# Altium PCB GlassLink-PCB.PcbDoc
Units mm, origin at the board's own origin, x right, y up, seen from the top; angles counter-clockwise.
Board outline 35.5 x 13.5 mm, 4 copper layers (Top Layer, L2, L3, Bottom Layer), stack 1.561 mm thick; 43 components, 28 nets, 163 pads, 35 vias.
Unrouted connection lines stored in the file: 1.
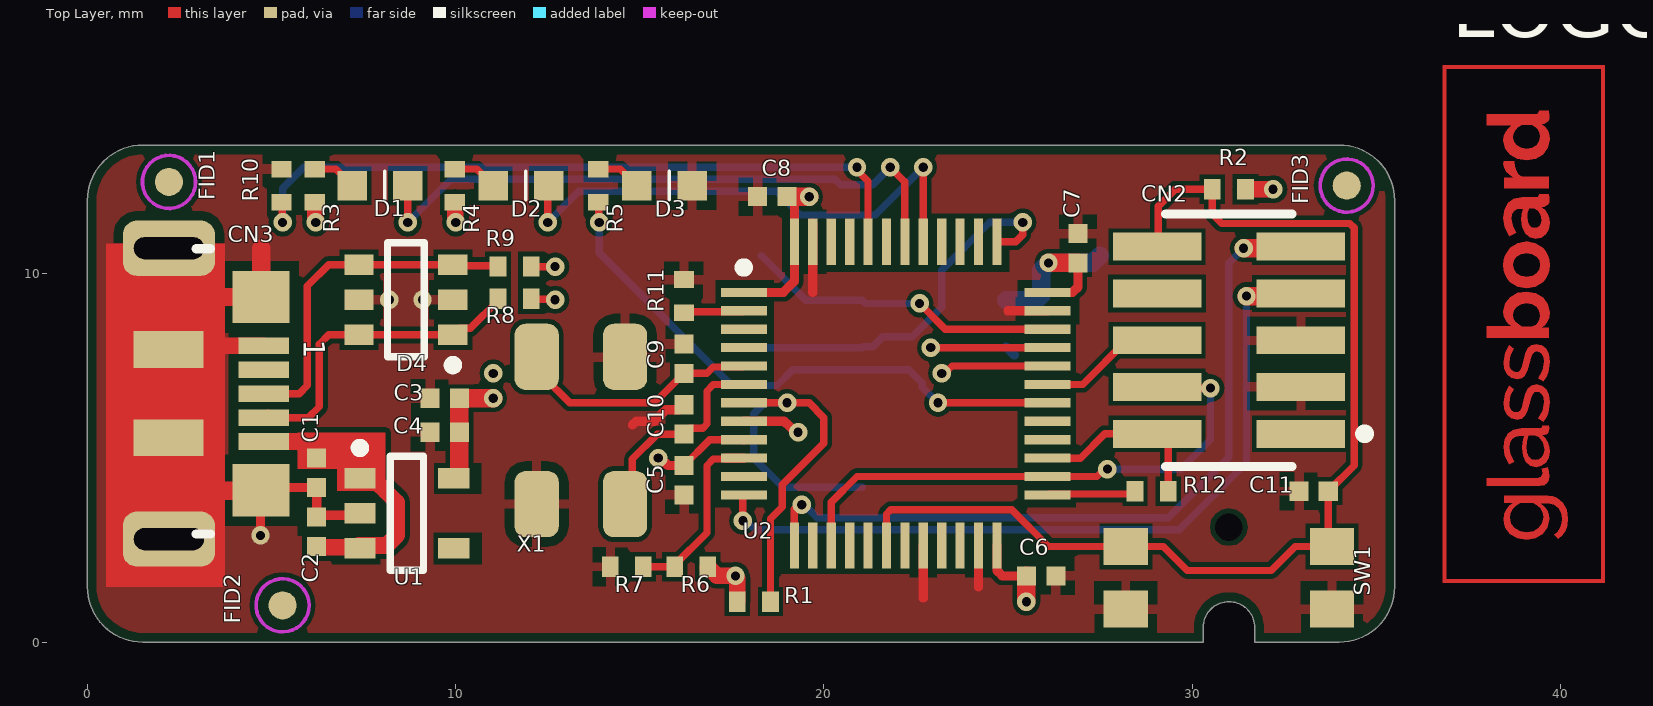
[diagram p0: Top Layer view]
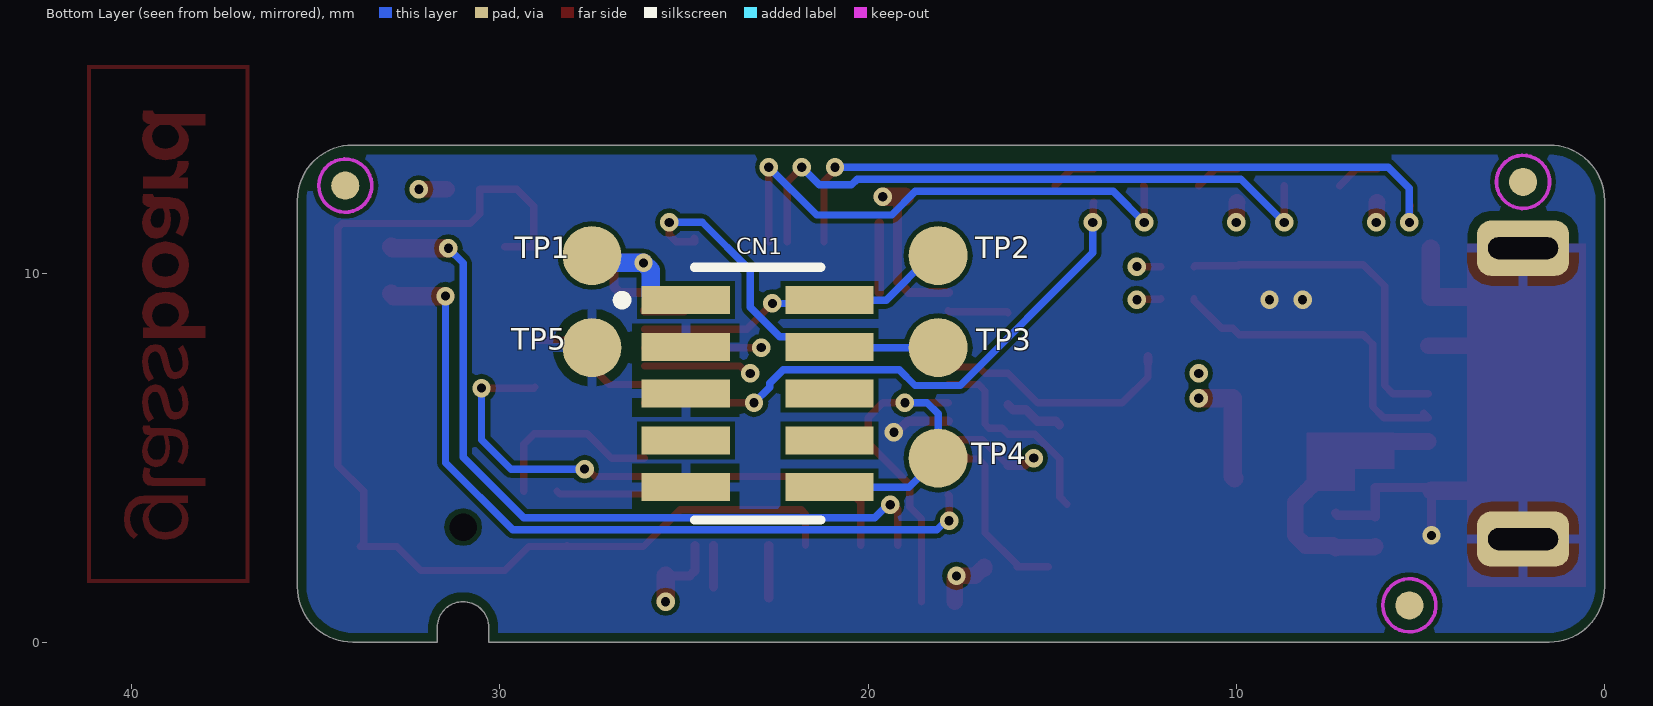
[diagram p1: Bottom Layer view, seen from below]
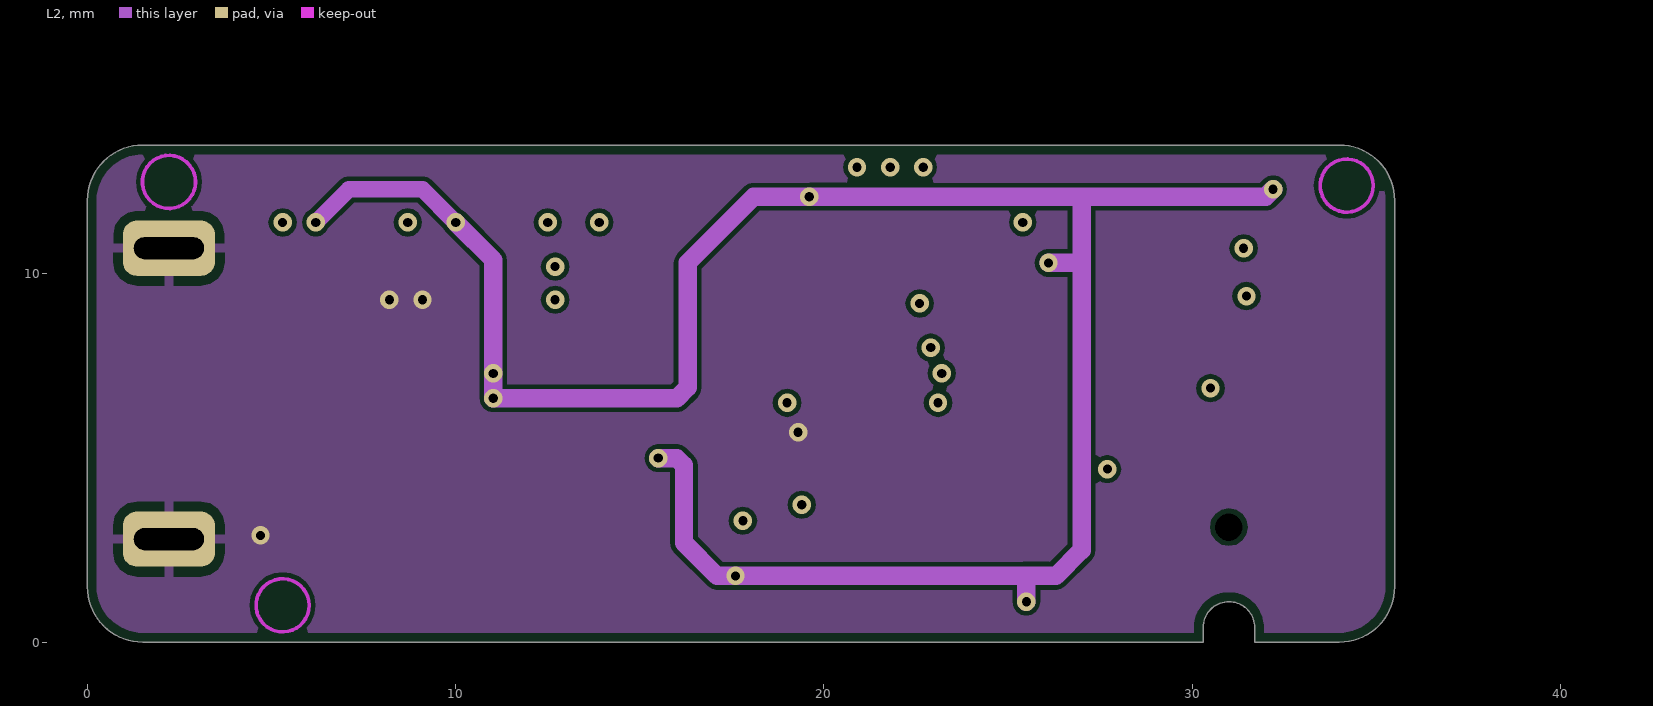
[diagram p2: L2]
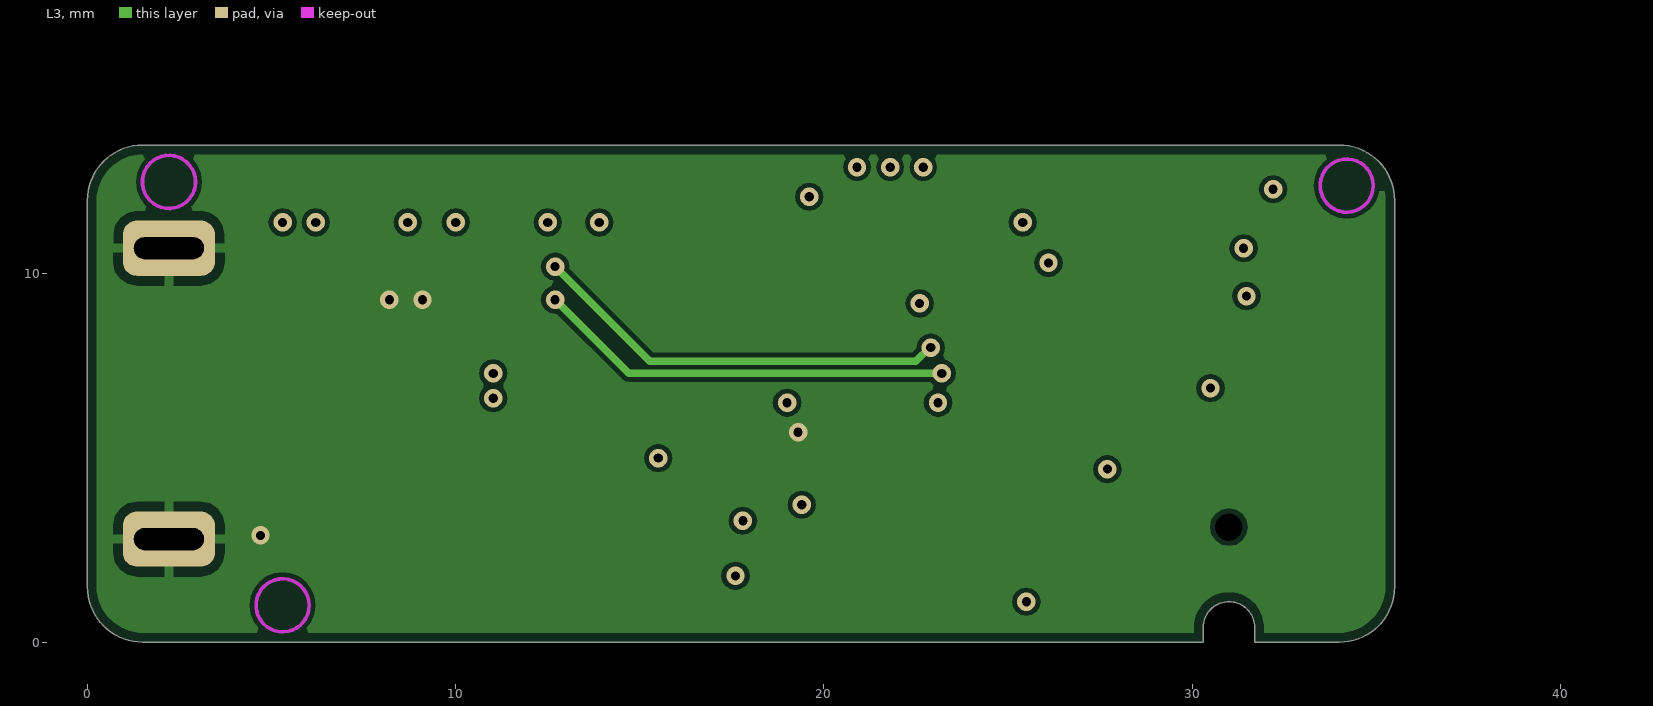
[diagram p3: L3]

## Layer stack, top to bottom
Top Solder: solder mask 0.02, Solder Resist, Dk 3.5
Top Layer: signal copper 0.0356
Dielectric 1: prepreg 0.2275, FR4-TG170, Dk 4.5
L2: signal copper 0.017
Dielectric 3: core 1, FR4-TG170, Dk 4.5
L3: signal copper 0.017
Dielectric 2: prepreg 0.228, FR4-TG170, Dk 4.5
Bottom Layer: signal copper 0.0356
Bottom Solder: solder mask 0.02, Solder Resist, Dk 3.5

## Board outline
0,1.5 ccw(c1.5,1.5) 1.5,0 30.3,0 30.3,0.4 cw(c31,0.4) 31,1.1 cw(c31,0.4) 31.7,0.4 31.7,0 34,0 ccw(c34,1.5) 35.5,1.5 35.5,12 ccw(c34,12) 34,13.5 1.5,13.5 ccw(c1.5,12) 0,12

## Design rules (kind name [scope] priority, off if disabled: settings)
BoardOutlineClearance [Not InComponent('CN1','CN2','CN28','SW1','SW3','U12','D4','D5')] p1: gap=0.254 ignorepadtopadclearanceinfootprint=FALSE
Clearance "Clearance~Sunstone Circuits" [All] p1: gap=0.127 ignorepadtopadclearanceinfootprint=FALSE except(0.152: Arc-Hole Track-Hole SMDPad-Hole THPad-Hole Via-Hole) // Sunstone Circuits Minimum Clearance Rule (MLB~4&6 Layer Designs)
DiffPairsRouting [All] p1: maxlimit=0.254 minlimit=0.102 mostfreqgap=0.127 toplayer_minwidth=0.102 toplayer_maxwidth=0.152 toplayer_prefwidth=0.127 midlayer1_minwidth=0.102 midlayer1_maxwidth=0.152 midlayer1_prefwidth=0.127 midlayer2_minwidth=0.102 midlayer2_maxwidth=0.152 midlayer2_prefwidth=0.127 bottomlayer_minwidth=0.102 bottomlayer_maxwidth=0.152 bottomlayer_prefwidth=0.127 maxuncoupledlength=12.7
HoleSize "HoleSize~Sunstone Circuits" [All] p1: absolutevalues=TRUE maxlimit=6.375 minlimit=0.152 maxpercent=80.000 minpercent=20.000 // Sunstone Circuits Hole Size Rule (MLB~4&6 Layer Designs)
HoleSize Testpoint [All] p2: absolutevalues=TRUE maxlimit=2.54 minlimit=0.025 maxpercent=80.000 minpercent=20.000
HoleSize TestPointUsage [All] p3: absolutevalues=TRUE maxlimit=2.54 minlimit=0.025 maxpercent=80.000 minpercent=20.000
HoleToHoleClearance [All] p1: gap=0.127 allowstackedmicrovias=TRUE
MatchedLengths Ethernet-100-RX [InDifferentialPair('ETH_RX')] p1: tolerance=0.508 checknetsindiffpair=TRUE checkdiffpairvsdiffpair=FALSE checkxsignals=FALSE checkothers=FALSE
MatchedLengths Ethernet-100_TX [InDifferentialPair('ETH_TX')] p2: tolerance=0.508 checknetsindiffpair=TRUE checkdiffpairvsdiffpair=FALSE checkxsignals=FALSE checkothers=FALSE
MatchedLengths USB-90 [InDifferentialPair('ETH_TX')] p3: tolerance=0.508 checknetsindiffpair=TRUE checkdiffpairvsdiffpair=FALSE checkxsignals=FALSE checkothers=FALSE
MinimumAnnularRing MinimumAnnularRing~Tempo [All] p1: minimumring=0.102 // Sunstone Circuits Minimum Annular Ring (MLB~4&6 Layer Designs)
MinimumSolderMaskSliver [Not InComponent('LOGO1')] p1: minsoldermaskwidth=0.127
PlaneClearance "PlaneClearance~Sunstone Circuits" [All] p1: clearance=0.2 // Sunstone Circuits Power Plane Clearance Rule (MLB~4&6 Layer Designs)
PlaneConnect "PlaneConnect~Sunstone Circuits" [IsVia] p1: planeconnectstyle=Direct reliefexpansion=0.152 reliefentries=4 reliefconductorwidth=0.203 reliefairgap=0.152 // Sunstone Circuits Power Plane Connect Rule (MLB~4&6 Layer Designs)
PolygonConnect [IsPad] p1: connectstyle=Relief reliefconductorwidth=0.254 reliefentries=4 polygonreliefangle="90 Angle" airgapwidth=0.254
PolygonConnect "PolygonConnect - GND" [InNet('GND')] p2: thpad.connectstyle=Relief thpad.reliefconductorwidth=0.2 thpad.reliefentries=4 thpad.polygonreliefangle="90 Angle" thpad.airgapwidth=0.2 smdpad.connectstyle=Relief smdpad.reliefconductorwidth=0.2 smdpad.reliefentries=4 smdpad.polygonreliefangle="90 Angle" smdpad.airgapwidth=0.2 via.connectstyle=Direct via.reliefconductorwidth=0.2 via.reliefentries=4 via.polygonreliefangle="90 Angle" via.airgapwidth=0.2
PolygonConnect "PolygonConnect~Sunstone Circuits" [IsVia] p3: connectstyle=Direct reliefconductorwidth=0.203 reliefentries=4 polygonreliefangle="90 Angle" airgapwidth=0 // Sunstone Circuits Polygon Connect Style (MLB~4&6 Layer Designs)
RoutingVias "RoutingVias~Sunstone Circuits" [All] p1: holewidth=0.254 width=0.508 viastyle="Through Hole" minholewidth=0.152 minwidth=0.381 maxholewidth=0.508 maxwidth=1.016 // Sunstone Circuits Routing Vias Rule (MLB~4&6 Layer Designs)
ShortCircuit "ShortCircuit~Sunstone Circuits" [All] p1: allowed=FALSE // Sunstone Circuits Short Circuit Rule~Do Not Allow (MLB~4&6 Layer Designs)
SilkToSilkClearance [All] p1: silktosilkclearance=0.127
SilkToSolderMaskClearance [IsPad] p1: minsilkscreentomaskgap=0.127 clearancetoexposedcopper=TRUE
SolderMaskExpansion "SolderMaskExpansion~Sunstone Circuits" [All] p1: expansion=0.076 istentingtop=FALSE // Sunstone Circuits Solder Mask Expansion Rule (MLB~4&6 Layer Designs)
ViasUnderSMD "ViasUnderSMD~Sunstone Circuits" [All] p1: allowed=FALSE // Sunstone Circuits Vias Under SMD~Do Not Allow (MLB~4&6 Layer Designs)
Width Width~Tempo [All] p1: maxlimit=2.54 minlimit=0.102 preferedwidth=0.254 // Sunstone Circuits Minimum Width Rule (MLB~4&6 Layer Designs)
21 further rules are at their usual default settings.

## Components (designator, comment, footprint, x,y, rotation, side; value= is the part's Value field where it differs from the comment)
C1 "10µF" CAPC0402(1005)70_L 6.225,4.6 r90 top
C2 "0.1µF" CAPC0402(1005)70_L 6.225,3 r270 top
C3 "0.1µF" CAPC0402(1005)70_L 9.7,6.623 r0 top
C4 "10µF" CAPC0402(1005)70_L 9.7,5.7 r0 top
C5 "0.1µF" CAPC0402(1005)70_L 16.2,4.4 r90 top
C6 "0.1µF" CAPC0402(1005)70_L 25.9,1.8 r180 top
C7 "0.1µF" CAPC0402(1005)70_L 26.9,10.7 r270 top
C8 "0.1µF" CAPC0402(1005)70_L 18.6,12.1 r0 top
C9 "18pF" CAPC0402(1005)70_L 16.2,7.7 r270 top
C10 "18pF" CAPC0402(1005)70_L 16.2,6.05 r270 top
C11 "0.1µF" CAPC0402(1005)70_L 33.3,4.1 r0 top
CN1 "FTSH-105-01-F-DV-K" FTSH-105-01-F-DV-K 23,6.75 r270 bottom
CN2 "FTSH-105-01-F-DV-K" FTSH-105-01-F-DV-K 31,8.2 r90 top
CN3 "1051640001" 1051640001 3.5,6.75 r270 top locked
D1 "LTST-C191TBKT" LTST-C191KGKT 7.946,12.4 r0 top
D2 "LTST-C191KGKT" LTST-C191KGKT 11.773,12.4 r0 top
D3 "LTST-C191KRKT" LTST-C191KGKT 15.673,12.4 r0 top
D4 "SN65220DBVR" SN65220DBVR-L 8.65,9.3 r180 top
FID1 "FID" fid_30mil 2.213,12.5 r90 top
FID2 "FID" fid_30mil 5.3,1 r90 top
FID3 "FID" fid_30mil 34.2,12.4 r90 top
LOGO1 "Glassboard-Logo" Glassboard-Sm 39.1,8.574 r90 top
R1 "10k" RESC0402(1005)_L 18.1,1.1 r180 top
R2 "10k" RESC0402(1005)_L 31,12.3 r0 top
R3 "1.5k" RESC0402(1005)_L 6.173,12.4 r90 top
R4 "1.5k" RESC0402(1005)_L 9.973,12.4 r90 top
R5 "470" RESC0402(1005)_L 13.873,12.4 r90 top
R6 "4.7k" RESC0402(1005)_L 16.4,2.05 r0 top
R7 "4.7k" RESC0402(1005)_L 14.65,2.05 r0 top
R8 "22" RESC0402(1005)_L 11.6,9.325 r0 top
R9 "22" RESC0402(1005)_L 11.6,10.2 r0 top
R10 "100k" RESC0402(1005)_L 5.273,12.4 r90 top
R11 "10k" RESC0402(1005)_L 16.2,9.4 r270 top
R12 "100" RESC0402(1005)_L 28.9,4.1 r0 top
SW1 "TL1014BF160QG" TL1014BF160QG 31,1.75 r0 top
TP1 "TESTFIXTURE_16MM" TESTFIXTURE_16MM 27.5,10.5 r180 bottom
TP2 "TESTFIXTURE_16MM" TESTFIXTURE_16MM 18.1,10.5 r180 bottom
TP3 "TESTFIXTURE_16MM" TESTFIXTURE_16MM 18.1,8 r180 bottom
TP4 "TESTFIXTURE_16MM" TESTFIXTURE_16MM 18.1,5 r180 bottom
TP5 "TESTFIXTURE_16MM" TESTFIXTURE_16MM 27.5,8 r180 bottom
U1 "AP2204K-3.3TRG1" AP2204K-3.3TRG1_L 8.675,3.5 r0 top
U2 "STM32F103CBT6" STM32F103CBT6 21.95,6.75 r0 top locked
X1 "ABM3B-8.000MHZ-B2-T" ABM3B-8.000MHZ-B2-T 13.4,5.75 r270 top

## Footprints (in the part's own frame and the unit in brackets; to place one, negate y for a bottom-side part, rotate by r counter-clockwise, add the part's x,y. Pads: shape width x height; smd on the part's side, far side on the other; paste and mask are expansions set on the pad)
1051640001 [mm] "CONN RCPT USB2.0 MICRO B SMD R/A"
  rect 0.45x1.38 smd: 1(1.3,1.287) 2(0.65,1.287) 3(0,1.287) 4(-0.65,1.287) 5(-1.3,1.287)
  rrect50% 1.5x2.5 hole 1.9 slot 0.6 at 0 deg: M1(-3.95,-1.287) M1(3.95,-1.287)
  rect 1.425x1.55 smd: M1(-2.625,1.215) M1(2.625,1.215)
  rect 1x1.9 smd: M1(-1.2,-1.3) M1(1.2,-1.3)
  Top Layer pour cut-out: -3.439,2.092 3.439,2.092 3.439,0.333 -3.439,0.333
  silkscreen extent -3.94,-0.54 3.81,-0.16, body extent -4.13,-3.39 4.07,1.76, height 2.48
ABM3B-8.000MHZ-B2-T [mm]
  rrect50% 1.8x1.2 smd: 1(-2,-1.2) 2(-2,1.2) 3(2,1.2) 4(2,-1.2)
  body extent -2.5,-1.6 2.5,1.6, height 1.11
AP2204K-3.3TRG1_L [mm]
  rect 0.85x0.55 smd: 1(-1.275,0.95) 2(-1.275,0) 3(-1.275,-0.95) 4(1.275,-0.95) 5(1.275,0.95)
  silkscreen extent -1.4,-1.55 0.45,1.9, body extent -1.5,-1.55 1.5,1.55, height 1.45
CAPC0402(1005)70_L [mm] "Chip Capacitor, Body 1.0x0.5mm, Height 0.7mm, IPC High Density"
  rect 0.52x0.52 smd: 1(-0.4,0) 2(0.4,0)
  body extent -0.55,-0.3 0.55,0.3, height 0.7
fid_30mil [mil]
  round 30 smd paste-39.37 mask+11.81: 0(0,0)
  round 30 smd far side paste-39.37 mask+11.81: 0(0,0)
  Keep-Out Layer circle w3.94: c0,0 r28.39
FTSH-105-01-F-DV-K [mm] "MINITEK 1.27MM PITCH 10 POSITION UNSHROUDED HEADER"
  rect 0.76x2.4 smd: 1(-2.54,-1.95) 2(-2.54,1.95) 3(-1.27,-1.95) 4(-1.27,1.95) 5(0,-1.95) 6(0,1.95) 7(1.27,-1.95) 8(1.27,1.95) 9(2.54,-1.95) 10(2.54,1.95)
  silkscreen extent -3.43,-3.81 3.43,1.72, body extent -3.17,-2.92 3.18,2.92, height 6.11
Glassboard-Sm [mm]
  Top Layer region: 0,0.411 0,0.411 0,0.411 0,0.411 0,0.411 0,0.411 0,0.411 0,0.411 0,0.411 0,0.411 0,0.411 0,0.411 0,0.411 0,0.411 0,0.411 0.075,0.51 0.17,0.584 0.284,0.63 0.415,0.646 0.632,0.594 0.801,0.458 0.91,0.256 0.948,0.013 0.905,-0.233 0.786,-0.431 0.605,-0.564 0.38,-0.613 0.249,-0.597 0.132,-0.55 0.035,-0.476 -0.039,-0.379 -0.039,-0.379 -0.039,-0.379 -0.039,-0.379 -0.039,-0.379 -0.039,-0.379 -0.039,-0.379 -0.039,-0.379 -0.039,-0.379 -0.039,-0.379 -0.039,-0.379 -0.039,-0.379 -0.039,-0.379 -0.039,-0.379 -0.039,-0.379 -0.039,-0.59 -0.31,-0.59 -0.31,1.102 0,1.102 hole: 0.313,0.381 0.313,0.381 0.313,0.381 0.214,0.364 0.214,0.364 0.214,0.364 0.126,0.313 0.126,0.313 0.126,0.313 0,0.145 0,0.145 0,0.145 0,-0.145 0,-0.145 0,-0.145 0.047,-0.228 0.047,-0.228 0.047,-0.228 0.118,-0.292 0.118,-0.292 0.118,-0.292 0.204,-0.334 0.204,-0.334 0.204,-0.334 0.294,-0.349 0.294,-0.349 0.294,-0.349 0.43,-0.32 0.43,-0.32 0.43,-0.32 0.537,-0.242 0.537,-0.242 0.537,-0.242 0.606,-0.129 0.606,-0.129 0.606,-0.129 0.631,0.01 0.631,0.01 0.631,0.011 0.607,0.152 0.607,0.152 0.607,0.152 0.541,0.27 0.541,0.27 0.541,0.27 0.44,0.351 0.44,0.351 0.44,0.351
  Top Layer region: 7.089,-2.102 -6.961,-2.102 -6.961,2.293 7.089,2.293 hole: 6.981,2.185 -6.853,2.185 -6.853,2.185 -6.853,2.185 -6.853,-1.994 -6.853,-1.994 -6.853,-1.994 6.981,-1.994 6.981,-1.994 6.981,-1.994 6.981,2.185 6.981,2.185
  Top Layer region: -4.121,-0.277 -4.121,-0.277 -4.121,-0.277 -4.085,-0.382 -4.085,-0.382 -4.085,-0.382 -4.085,-0.382 -4.085,-0.382 -4.085,-0.382 -4.085,-0.382 -3.984,-0.421 -3.984,-0.421 -3.984,-0.421 -3.924,-0.413 -3.924,-0.413 -3.924,-0.413 -3.859,-0.393 -3.827,-0.557 -3.947,-0.592 -4.07,-0.606 -4.176,-0.589 -4.256,-0.539 -4.308,-0.458 -4.325,-0.351 -4.325,1.102 -4.121,1.102
  Top Layer region: 4.458,0.642 4.483,0.639 4.483,0.356 4.349,0.341 4.349,0.341 4.349,0.341 4.23,0.301 4.23,0.301 4.23,0.301 4.134,0.236 4.134,0.236 4.134,0.236 4.07,0.145 4.07,0.145 4.07,0.145 4.07,-0.59 3.76,-0.59 3.76,0.625 4.045,0.625 4.045,0.365 4.045,0.365 4.045,0.365 4.045,0.365 4.045,0.365 4.045,0.365 4.045,0.365 4.045,0.365 4.045,0.365 4.045,0.365 4.045,0.365 4.045,0.365 4.045,0.365 4.045,0.365 4.045,0.365 4.117,0.478 4.208,0.567 4.311,0.624 4.42,0.643
  Top Layer region: 5.769,-0.233 5.769,-0.233 5.769,-0.233 5.787,-0.303 5.787,-0.303 5.787,-0.303 5.787,-0.303 5.788,-0.303 5.788,-0.303 5.788,-0.303 5.852,-0.326 5.852,-0.59 5.704,-0.606 5.628,-0.595 5.571,-0.567 5.512,-0.462 5.505,-0.379 5.505,-0.379 5.505,-0.379 5.505,-0.379 5.505,-0.379 5.505,-0.379 5.505,-0.379 5.505,-0.379 5.505,-0.379 5.505,-0.379 5.505,-0.379 5.505,-0.379 5.505,-0.379 5.505,-0.379 5.505,-0.379 5.426,-0.48 5.324,-0.554 5.207,-0.598 5.083,-0.613 4.852,-0.564 4.671,-0.43 4.551,-0.229 4.508,0.017 4.549,0.263 4.661,0.462 4.833,0.597 5.051,0.646 5.177,0.629 5.29,0.581 5.386,0.506 5.459,0.411 5.459,0.411 5.459,0.411 5.459,0.411 5.459,0.411 5.459,0.411 5.459,0.411 5.459,0.411 5.459,0.411 5.459,0.411 5.459,0.411 5.459,0.411 5.459,0.411 5.459,0.411 5.459,0.411 5.459,1.102 5.769,1.102 hole: 5.146,0.381 5.146,0.381 5.146,0.381 5.017,0.351 5.017,0.351 5.017,0.351 4.916,0.269 4.916,0.269 4.916,0.269 4.851,0.15 4.851,0.15 4.851,0.15 4.828,0.011 4.828,0.01 4.828,0.01 4.853,-0.131 4.853,-0.131 4.853,-0.131 4.924,-0.245 4.924,-0.245 4.924,-0.245 5.031,-0.321 5.031,-0.321 5.031,-0.321 5.164,-0.349 5.164,-0.349 5.164,-0.349 5.255,-0.334 5.255,-0.334 5.255,-0.334 5.34,-0.291 5.34,-0.291 5.34,-0.291 5.412,-0.226 5.412,-0.226 5.412,-0.226 5.461,-0.145 5.461,-0.145 5.461,-0.145 5.461,0.145 5.461,0.145 5.461,0.145 5.409,0.238 5.409,0.238 5.409,0.238 5.332,0.314 5.332,0.314 5.332,0.314 5.241,0.365 5.241,0.365 5.241,0.365
  Top Layer region: 3.19,0.613 3.364,0.517 3.473,0.36 3.509,0.145 3.509,-0.233 3.509,-0.233 3.509,-0.233 3.528,-0.303 3.528,-0.303 3.528,-0.303 3.528,-0.303 3.528,-0.303 3.528,-0.303 3.528,-0.303 3.593,-0.326 3.593,-0.59 3.51,-0.603 3.51,-0.603 3.444,-0.606 3.367,-0.595 3.31,-0.565 3.252,-0.462 3.245,-0.395 3.245,-0.395 3.245,-0.395 3.245,-0.395 3.245,-0.395 3.245,-0.395 3.245,-0.395 3.245,-0.395 3.245,-0.395 3.245,-0.395 3.245,-0.395 3.245,-0.395 3.245,-0.395 3.245,-0.395 3.155,-0.489 3.048,-0.557 2.928,-0.599 2.8,-0.613 2.635,-0.584 2.503,-0.503 2.416,-0.381 2.385,-0.228 2.423,-0.07 2.53,0.054 2.693,0.134 2.902,0.163 3.061,0.149 3.199,0.11 3.199,0.11 3.199,0.11 3.199,0.11 3.199,0.11 3.199,0.11 3.199,0.11 3.199,0.11 3.199,0.11 3.199,0.11 3.199,0.11 3.199,0.18 3.199,0.18 3.199,0.18 3.181,0.286 3.181,0.286 3.181,0.286 3.13,0.365 3.13,0.365 3.13,0.365 3.045,0.414 3.045,0.414 3.045,0.414 2.927,0.43 2.927,0.43 2.927,0.43 2.737,0.395 2.737,0.395 2.737,0.395 2.547,0.293 2.452,0.49 2.696,0.607 2.958,0.646 hole: 2.953,-0.01 2.953,-0.01 2.953,-0.01 2.843,-0.024 2.843,-0.024 2.843,-0.024 2.756,-0.065 2.756,-0.065 2.756,-0.065 2.698,-0.127 2.698,-0.127 2.698,-0.127 2.679,-0.203 2.679,-0.203 2.679,-0.203 2.694,-0.275 2.694,-0.275 2.694,-0.275 2.74,-0.334 2.74,-0.334 2.74,-0.334 2.807,-0.373 2.807,-0.373 2.807,-0.373 2.888,-0.386 2.888,-0.386 2.888,-0.386 3.037,-0.358 3.037,-0.358 3.037,-0.358 3.148,-0.284 3.148,-0.284 3.148,-0.284 3.199,-0.196 3.199,-0.196 3.199,-0.196 3.199,-0.057 3.199,-0.057 3.199,-0.057 3.199,-0.057 3.199,-0.057 3.199,-0.057 3.199,-0.057 3.078,-0.023 3.078,-0.023 3.078,-0.023
  Top Layer region: 1.814,0.633 1.939,0.594 2.138,0.457 2.264,0.256 2.309,0.015 2.264,-0.224 2.139,-0.424 2.049,-0.502 1.94,-0.562 1.814,-0.6 1.673,-0.613 1.533,-0.6 1.407,-0.562 1.298,-0.502 1.207,-0.424 1.08,-0.224 1.036,0.015 1.08,0.256 1.207,0.457 1.298,0.535 1.407,0.594 1.533,0.633 1.673,0.645 hole: 1.673,0.381 1.673,0.381 1.673,0.381 1.548,0.354 1.548,0.353 1.548,0.353 1.447,0.277 1.447,0.277 1.447,0.277 1.38,0.161 1.38,0.161 1.38,0.161 1.356,0.015 1.356,0.015 1.356,0.015 1.38,-0.132 1.38,-0.132 1.38,-0.132 1.447,-0.247 1.447,-0.247 1.447,-0.247 1.548,-0.322 1.548,-0.322 1.548,-0.322 1.673,-0.349 1.673,-0.349 1.673,-0.349 1.799,-0.322 1.799,-0.322 1.799,-0.322 1.9,-0.247 1.9,-0.247 1.9,-0.247 1.967,-0.131 1.967,-0.131 1.967,-0.131 1.991,0.017 1.991,0.017 1.991,0.017 1.967,0.163 1.967,0.164 1.967,0.164 1.9,0.279 1.9,0.279 1.9,0.279 1.799,0.355 1.799,0.355 1.799,0.355
  Top Layer region: -3.058,0.609 -2.9,0.513 -2.799,0.36 -2.765,0.154 -2.765,-0.34 -2.765,-0.34 -2.765,-0.34 -2.749,-0.394 -2.749,-0.394 -2.749,-0.394 -2.749,-0.394 -2.749,-0.394 -2.749,-0.394 -2.749,-0.394 -2.7,-0.414 -2.7,-0.59 -2.744,-0.597 -2.744,-0.597 -2.784,-0.599 -2.883,-0.571 -2.921,-0.534 -2.936,-0.476 -2.941,-0.39 -2.941,-0.39 -2.941,-0.39 -2.941,-0.39 -2.941,-0.39 -2.941,-0.39 -2.941,-0.39 -2.941,-0.39 -2.941,-0.39 -2.941,-0.39 -2.941,-0.39 -3.036,-0.488 -3.15,-0.557 -3.274,-0.599 -3.4,-0.613 -3.567,-0.584 -3.699,-0.505 -3.786,-0.387 -3.817,-0.242 -3.78,-0.086 -3.675,0.035 -3.512,0.111 -3.307,0.138 -3.129,0.122 -2.969,0.078 -2.969,0.078 -2.969,0.078 -2.969,0.078 -2.969,0.078 -2.969,0.078 -2.969,0.078 -2.969,0.078 -2.969,0.078 -2.969,0.078 -2.969,0.078 -2.969,0.175 -2.969,0.175 -2.969,0.175 -2.99,0.307 -2.99,0.307 -2.99,0.307 -3.052,0.408 -3.052,0.408 -3.052,0.408 -3.153,0.471 -3.153,0.471 -3.153,0.471 -3.289,0.493 -3.289,0.493 -3.289,0.493 -3.477,0.457 -3.477,0.457 -3.477,0.457 -3.674,0.351 -3.741,0.483 -3.507,0.602 -3.266,0.641 hole: -3.275,0.015 -3.275,0.015 -3.275,0.015 -3.417,-0.001 -3.417,-0.001 -3.417,-0.001 -3.528,-0.049 -3.528,-0.049 -3.528,-0.049 -3.599,-0.124 -3.599,-0.124 -3.599,-0.124 -3.623,-0.224 -3.623,-0.224 -3.623,-0.224 -3.604,-0.313 -3.604,-0.313 -3.604,-0.313 -3.551,-0.388 -3.551,-0.388 -3.551,-0.388 -3.465,-0.44 -3.465,-0.44 -3.465,-0.44 -3.349,-0.46 -3.349,-0.46 -3.349,-0.46 -3.159,-0.418 -3.159,-0.418 -3.159,-0.418 -3.013,-0.317 -3.013,-0.316 -3.013,-0.316 -2.969,-0.221 -2.969,-0.221 -2.969,-0.221 -2.969,-0.043 -2.969,-0.043 -2.969,-0.043 -2.969,-0.043 -2.969,-0.043 -2.969,-0.043 -2.969,-0.043 -3.121,0 -3.121,0 -3.121,0
  Top Layer region: -1.808,0.597 -1.609,0.481 -1.701,0.358 -1.873,0.459 -1.873,0.459 -1.873,0.459 -2.067,0.493 -2.067,0.493 -2.067,0.493 -2.17,0.481 -2.17,0.481 -2.17,0.481 -2.256,0.445 -2.256,0.445 -2.256,0.445 -2.315,0.383 -2.315,0.383 -2.315,0.383 -2.334,0.293 -2.334,0.293 -2.334,0.293 -2.319,0.224 -2.319,0.224 -2.319,0.224 -2.269,0.175 -2.269,0.175 -2.269,0.175 -2.18,0.138 -2.18,0.138 -2.18,0.138 -2.049,0.103 -1.839,0.046 -1.691,-0.022 -1.603,-0.115 -1.574,-0.244 -1.606,-0.396 -1.703,-0.513 -1.856,-0.588 -2.053,-0.613 -2.341,-0.568 -2.472,-0.512 -2.584,-0.437 -2.496,-0.3 -2.283,-0.422 -2.283,-0.422 -2.283,-0.422 -2.058,-0.462 -2.058,-0.462 -2.058,-0.462 -1.94,-0.449 -1.94,-0.449 -1.94,-0.449 -1.848,-0.41 -1.848,-0.41 -1.848,-0.41 -1.79,-0.347 -1.79,-0.347 -1.79,-0.347 -1.771,-0.263 -1.771,-0.263 -1.771,-0.263 -1.792,-0.188 -1.792,-0.188 -1.792,-0.188 -1.854,-0.133 -1.854,-0.133 -1.854,-0.133 -1.961,-0.091 -1.961,-0.091 -1.961,-0.091 -2.111,-0.052 -2.299,0.001 -2.429,0.061 -2.503,0.145 -2.526,0.265 -2.49,0.426 -2.392,0.545 -2.245,0.617 -2.063,0.641
  Top Layer region: -0.711,0.597 -0.512,0.481 -0.605,0.358 -0.776,0.459 -0.776,0.459 -0.776,0.459 -0.971,0.493 -0.971,0.493 -0.971,0.493 -1.074,0.481 -1.074,0.481 -1.074,0.481 -1.16,0.445 -1.16,0.445 -1.16,0.445 -1.218,0.383 -1.218,0.383 -1.218,0.383 -1.238,0.293 -1.238,0.293 -1.238,0.293 -1.223,0.224 -1.223,0.224 -1.223,0.224 -1.173,0.175 -1.173,0.175 -1.173,0.175 -1.084,0.138 -1.084,0.138 -1.084,0.138 -0.953,0.103 -0.743,0.046 -0.595,-0.022 -0.506,-0.115 -0.477,-0.244 -0.51,-0.396 -0.607,-0.513 -0.76,-0.588 -0.957,-0.613 -1.245,-0.568 -1.376,-0.512 -1.488,-0.437 -1.4,-0.3 -1.187,-0.422 -1.187,-0.422 -1.187,-0.422 -0.962,-0.462 -0.962,-0.462 -0.962,-0.462 -0.843,-0.449 -0.843,-0.449 -0.843,-0.449 -0.752,-0.41 -0.752,-0.41 -0.752,-0.41 -0.694,-0.347 -0.694,-0.347 -0.694,-0.347 -0.674,-0.263 -0.674,-0.263 -0.674,-0.263 -0.695,-0.188 -0.695,-0.188 -0.695,-0.188 -0.758,-0.133 -0.758,-0.133 -0.758,-0.133 -0.864,-0.091 -0.864,-0.091 -0.864,-0.091 -1.015,-0.052 -1.015,-0.052 -1.203,0.001 -1.333,0.061 -1.407,0.145 -1.43,0.265 -1.394,0.426 -1.296,0.545 -1.148,0.617 -0.966,0.641
  Top Layer region: -5.093,0.622 -4.972,0.567 -4.869,0.483 -4.784,0.379 -4.784,0.379 -4.784,0.379 -4.784,0.379 -4.784,0.379 -4.784,0.379 -4.784,0.379 -4.784,0.379 -4.784,0.379 -4.784,0.379 -4.784,0.379 -4.784,0.379 -4.784,0.379 -4.784,0.379 -4.784,0.379 -4.784,0.62 -4.603,0.62 -4.603,-0.576 -4.615,-0.698 -4.652,-0.804 -4.784,-0.97 -4.98,-1.072 -5.22,-1.107 -5.407,-1.089 -5.554,-1.036 -5.673,-0.952 -5.769,-0.84 -5.651,-0.736 -5.568,-0.829 -5.568,-0.829 -5.568,-0.829 -5.465,-0.896 -5.465,-0.896 -5.465,-0.896 -5.347,-0.936 -5.347,-0.936 -5.347,-0.936 -5.22,-0.949 -5.22,-0.949 -5.22,-0.949 -5.061,-0.926 -5.061,-0.926 -5.061,-0.926 -4.93,-0.856 -4.93,-0.856 -4.93,-0.856 -4.841,-0.741 -4.841,-0.741 -4.841,-0.741 -4.807,-0.576 -4.807,-0.576 -4.807,-0.576 -4.807,-0.363 -4.807,-0.363 -4.807,-0.363 -4.807,-0.363 -4.807,-0.363 -4.807,-0.363 -4.807,-0.363 -4.807,-0.363 -4.807,-0.363 -4.807,-0.363 -4.807,-0.363 -4.807,-0.363 -4.807,-0.363 -4.807,-0.363 -4.807,-0.363 -4.889,-0.463 -4.992,-0.54 -5.111,-0.588 -5.238,-0.604 -5.464,-0.553 -5.641,-0.416 -5.756,-0.219 -5.797,0.013 -5.756,0.255 -5.641,0.455 -5.464,0.591 -5.355,0.628 -5.236,0.641 hole: -5.194,0.465 -5.194,0.465 -5.194,0.465 -5.36,0.425 -5.36,0.425 -5.36,0.425 -5.484,0.321 -5.484,0.321 -5.484,0.321 -5.563,0.174 -5.563,0.174 -5.563,0.174 -5.59,0.008 -5.59,0.008 -5.59,0.008 -5.558,-0.163 -5.558,-0.163 -5.558,-0.163 -5.47,-0.305 -5.47,-0.305 -5.47,-0.305 -5.339,-0.401 -5.339,-0.401 -5.339,-0.401 -5.176,-0.437 -5.176,-0.437 -5.176,-0.437 -5.05,-0.414 -5.05,-0.414 -5.05,-0.414 -4.939,-0.352 -4.939,-0.352 -4.939,-0.352 -4.853,-0.265 -4.853,-0.265 -4.853,-0.265 -4.807,-0.166 -4.807,-0.166 -4.807,-0.166 -4.807,0.182 -4.807,0.182 -4.807,0.182 -4.873,0.296 -4.873,0.296 -4.873,0.296 -4.965,0.385 -4.965,0.385 -4.965,0.385 -5.075,0.444 -5.075,0.444 -5.075,0.444
LTST-C191KGKT [mm] "LED GREEN CLEAR THIN 0603 SMD"
  rect 0.8x0.8 smd: 1(-0.75,0) 2(0.75,0)
  silkscreen extent 0.13,-0.38 0.13,0.38, body extent -0.76,-0.38 0.76,0.38, height 0.55
RESC0402(1005)_L [mm] "Chip Resistor, Body 1.0x0.5mm, IPC High Density"
  rect 0.45x0.55 smd: 1(-0.45,0) 2(0.45,0)
  body extent -0.52,-0.27 0.53,0.28, height 0.4
SN65220DBVR-L [mm]
  rect 0.8x0.55 smd: 1(-1.275,0.95) 2(-1.275,0) 3(-1.275,-0.95) 4(1.275,-0.95) 5(1.275,0) 6(1.275,0.95)
  silkscreen extent -1.4,-1.55 0.5,1.9, body extent -1.5,-1.52 1.5,1.53, height 1.45
STM32F103CBT6 [mm] "IC MCU 32BIT 128KB FLASH 48LQFP"
  rect 1.25x0.25 smd: 1(-4.125,2.75) 2(-4.125,2.25) 3(-4.125,1.75) 4(-4.125,1.25) 5(-4.125,0.75) 6(-4.125,0.25) 7(-4.125,-0.25) 8(-4.125,-0.75) 9(-4.125,-1.25) 10(-4.125,-1.75) 11(-4.125,-2.25) 12(-4.125,-2.75) 25(4.125,-2.75) 26(4.125,-2.25) 27(4.125,-1.75) 28(4.125,-1.25) 29(4.125,-0.75) 30(4.125,-0.25) 31(4.125,0.25) 32(4.125,0.75) 33(4.125,1.25) 34(4.125,1.75) 35(4.125,2.25) 36(4.125,2.75)
  rect 0.25x1.25 smd: 13(-2.75,-4.125) 14(-2.25,-4.125) 15(-1.75,-4.125) 16(-1.25,-4.125) 17(-0.75,-4.125) 18(-0.25,-4.125) 19(0.25,-4.125) 20(0.75,-4.125) 21(1.25,-4.125) 22(1.75,-4.125) 23(2.25,-4.125) 24(2.75,-4.125) 37(2.75,4.125) 38(2.25,4.125) 39(1.75,4.125) 40(1.25,4.125) 41(0.75,4.125) 42(0.25,4.125) 43(-0.25,4.125) 44(-0.75,4.125) 45(-1.25,4.125) 46(-1.75,4.125) 47(-2.25,4.125) 48(-2.75,4.125)
  Top Layer pour cut-out: 3.1,4.9 3.1,3.3 -3.1,3.3 -3.1,4.9
  Top Layer pour cut-out: 4.9,-3.1 3.3,-3.1 3.3,3.1 4.9,3.1
  Top Layer pour cut-out: -4.9,3.1 -3.3,3.1 -3.3,-3.1 -4.9,-3.1
  Top Layer pour cut-out: -3.1,-4.9 -3.1,-3.3 3.1,-3.3 3.1,-4.9
  Top Layer pour cut-out: -4.9,3.1 -3.3,3.1 -3.3,-3.1 -4.9,-3.1
  silkscreen extent -4.25,3.3 -4,3.55, body extent -4.5,-4.5 4.5,4.5, height 1.6
TESTFIXTURE_16MM [mm]
  round 1.6 smd paste-1.6: 1(0,0)
  body extent -0.79,-0.8 0.8,0.8, height 0.05
TL1014BF160QG [mm]
  rect 1.2x1 smd mask+0.05: 1(2.8,0.85) 2(2.8,-0.85) 3(-2.8,0.85) 4(-2.8,-0.85)
  round 0 hole 0.75 unplated mask+0.05: 5(0,1.375) 6(0,-1.375)
  body extent -3.2,-2.75 3.2,1.75, height 1.65

## Part data
C1 C4: library part CC0402MRX5R5BB106, "CAP CER 10UF 6.3V X5R 0402", Distributor 1 Part Number=311-1729-1-ND, Manufacturer=Yageo, Package=CAP0402, Package Type=SMD, Tolerance=0.2, Voltage=6.3V, Component Type="CAP - CHIP", Distributor 1=Digi-Key, ESD=NO, Manufacturer Part Number=CC0402MRX5R5BB106, Moisture Sensitivity=NO, Part Number=CC0402MRX5R5BB106, Pin Count=2, Published=9/8/2017, Publisher="Randy Parmerlee", Status=Active, Wattage=N/A
C2 C3 C5 C6 C7 C8 C11: library part CGA2B2X5R1A104M050BA, "CAP CER 0.1UF 10V X5R 0402", Distributor 1 Part Number=445-12157-1-ND, Manufacturer="TDK Corporation", Package=CAP0402, Package Type=SMD, Tolerance=0.2, Voltage=10V, Component Type="CAP - CHIP", Distributor 1=Digi-Key, ESD=NO, Manufacturer Part Number=CGA2B2X5R1A104M050BA, Moisture Sensitivity=NO, Part Number=CGA2B2X5R1A104M050BA, Pin Count=2, Published=12/9/2015, Publisher="Drew Westrick", Status=Active, Wattage=N/A
C9 C10: library part CC0402JRNPO9BN180, "CAP CER 18PF 50V C0G/NPO 0402", Distributor 1 Part Number=311-1415-1-ND, Manufacturer=Yageo, Package=CAP0402, Package Type=SMD, Tolerance=0.05, Voltage=50V, Component Type="CAP - CHIP", Distributor 1=Digi-Key, ESD=NO, Manufacturer Part Number=CC0402JRNPO9BN180, Moisture Sensitivity=NO, Part Number=CC0402JRNPO9BN180, Pin Count=2, Published=9/8/2017, Publisher="Randy Parmerlee", Status=Active, Wattage=N/A
CN1 CN2: "CONN HEADER 10POS DUAL .05\" SMD", Current=N/A, Distributor 1 Part Number=SAM8796-ND, Manufacturer="Samtec Inc", Package Type=SMD, Component Type="CONN - SMD", Distributor 1=Digi-Key, ESD=NO, Manufacturer Part Number=FTSH-105-01-F-DV-K, Moisture Sensitivity=NO, Part Number=FTSH-105-01-F-DV-K, Pin Count=10, Published=10/4/2016, Publisher="Drew Westrick", Status=Active, Voltage=N/A
CN3: "CONN RCPT USB2.0 MICRO B SMD R/A", Current=N/A, Distributor 1 Part Number=WM11263CT-ND, Manufacturer=Molex, Package Type="SMD - PTH", Component Type="CONN - SMD", Distributor 1=Digi-Key, ESD=NO, Manufacturer Part Number=1051640001, Moisture Sensitivity=NO, Part Number=1051640001, Pin Count=6, Published=5/20/2019, Publisher="Ethan Harmon", Status=Active, Voltage=N/A
D1: "LED BLUE CLEAR 0603 SMD", Distributor 1 Part Number=160-1647-1-ND, Manufacturer="Lite-On Inc", Package=LED0603, Package Type=SMD, Tolerance=N/A, Component Type="LED - SMD", Distributor 1=Digi-Key, ESD=YES, Manufacturer Part Number=LTST-C191TBKT, Moisture Sensitivity=YES, Part Number=LTST-C191TBKT, Pin Count=2, Published=6/8/2016, Publisher="Randy Parmerlee", Status=Active, Voltage=N/A, Wattage=N/A
D2: "LED GREEN CLEAR THIN 0603 SMD", Distributor 1 Part Number=160-1446-1-ND, Manufacturer="Lite-On Inc", Package=LED0603, Package Type=SMD, Tolerance=N/A, Component Type="LED - SMD", Distributor 1=Digi-Key, ESD=YES, Manufacturer Part Number=LTST-C191KGKT, Moisture Sensitivity=YES, Part Number=LTST-C191KGKT, Pin Count=2, Published=8/25/2015, Publisher="Randy Parmerlee", Status=Active, Voltage=N/A, Wattage=N/A
D3: "LED RED CLEAR 0603 SMD", Distributor 1 Part Number=160-1447-1-ND, Manufacturer="Lite-On Inc", Package=LED0603, Package Type=SMD, Tolerance=N/A, Component Type="LED - SMD", Distributor 1=Digi-Key, ESD=YES, Manufacturer Part Number=LTST-C191KRKT, Moisture Sensitivity=YES, Part Number=LTST-C191KRKT, Pin Count=2, Published=6/8/2016, Publisher="Randy Parmerlee", Status=Active, Voltage=N/A, Wattage=N/A
D4: "IC SINGLE USB PORT TVS SOT-23-6", Current=N/A, Distributor 1 Part Number=296-9694-1-ND, Manufacturer="Texas Instruments", Package=SOT-23-6, Package Type=SMD, Voltage=5V, Component Type="DIO - SMD", Distributor 1=Digi-Key, ESD=YES, Manufacturer Part Number=SN65220DBVR, Moisture Sensitivity=YES, Part Number=SN65220DBVR, Pin Count=6, Published=5/9/2016, Publisher="Randy Parmerlee", Status=Active, Tolerance=N/A
FID1 FID2 FID3: library part Fiducial, "Surface Mount Fiducials", Current=N/A, Component Type="FID - SMD", Distributor 1=N/A, Distributor 1 Part Number=N/A, ESD=NO, Manufacturer=N/A, Manufacturer Part Number=N/A, Moisture Sensitivity=NO, Package Type=N/A, Part Number=Fiducial, Pin Count=1, Published=11/19/2015, Publisher="Randy Parmerlee", Status=Active, Voltage=N/A
LOGO1: library part Glassboard-Logo-Sm, "Glassboard Company Logo Small", Part Number=Glassboard-Logo-Sm, Published=11/23/2015, Publisher="Drew Westrick", Status=Active
R1 R2 R11: library part RC0402FR-0710KL, "RES SMD 10K OHM 1% 1/16W 0402", Distributor 1 Part Number=311-10.0KLRCT-ND, Manufacturer=Yageo, Package=RES0402, Package Type=SMD, Tolerance=0.01, Voltage=N/A, Component Type="RES - CHIP", Distributor 1=Digi-Key, ESD=NO, Manufacturer Part Number=RC0402FR-0710KL, Moisture Sensitivity=NO, Part Number=RC0402FR-0710KL, Pin Count=2, Published=9/6/2017, Publisher="Randy Parmerlee", Status=Active, Wattage=0.063W
R3 R4: library part ERJ-2RKF1501X, "RES SMD 1.5K OHM 1% 1/10W 0402", Distributor 1 Part Number=P1.50KLCT-ND, Manufacturer="Panasonic Electronic Components", Package=RES0402, Package Type=SMD, Tolerance=0.01, Voltage=N/A, Component Type="RES - CHIP", Distributor 1=Digi-Key, ESD=NO, Manufacturer Part Number=ERJ-2RKF1501X, Moisture Sensitivity=NO, Part Number=ERJ-2RKF1501X, Pin Count=2, Published=12/9/2015, Publisher="Drew Westrick", Status="Not For Use", Wattage=0.1W
R5: library part ERJ-2RKF4700X, "RES SMD 470 OHM 1% 1/10W 0402", Distributor 1 Part Number=P470LCT-ND, Manufacturer="Panasonic Electronic Components", Package=RES0402, Package Type=SMD, Tolerance=0.01, Voltage=N/A, Component Type="RES - CHIP", Distributor 1=Digi-Key, ESD=NO, Manufacturer Part Number=ERJ-2RKF4700X, Moisture Sensitivity=NO, Part Number=ERJ-2RKF4700X, Pin Count=2, Published=12/9/2015, Publisher="Drew Westrick", Status="Not For Use", Wattage=0.1W
R6 R7: library part ERJ-2RKF4701X, "RES SMD 4.7K OHM 1% 1/10W 0402", Distributor 1 Part Number=P4.70KLCT-ND, Manufacturer="Panasonic Electronic Components", Package=RES0402, Package Type=SMD, Tolerance=0.01, Voltage=N/A, Component Type="RES - CHIP", Distributor 1=Digi-Key, ESD=NO, Manufacturer Part Number=ERJ-2RKF4701X, Moisture Sensitivity=NO, Part Number=ERJ-2RKF4701X, Pin Count=2, Published=12/9/2015, Publisher="Drew Westrick", Status="Not For Use", Wattage=0.1W
R8 R9: library part RC0402FR-0722RL, "RES SMD 22 OHM 1% 1/16W 0402", Distributor 1 Part Number=311-22.0LRCT-ND, Manufacturer=Yageo, Package=RES0402, Package Type=SMD, Tolerance=0.01, Voltage=N/A, Component Type="RES - CHIP", Distributor 1=Digi-Key, ESD=NO, Manufacturer Part Number=RC0402FR-0722RL, Moisture Sensitivity=NO, Part Number=RC0402FR-0722RL, Pin Count=2, Published=9/6/2017, Publisher="Randy Parmerlee", Status=Active, Wattage=0.063W
R10: library part RC0402FR-07100KL, "RES SMD 100K OHM 1% 1/16W 0402", Distributor 1 Part Number=311-100KLRCT-ND, Manufacturer=Yageo, Package=RES0402, Package Type=SMD, Tolerance=0.01, Voltage=N/A, Component Type="RES - CHIP", Distributor 1=Digi-Key, ESD=NO, Manufacturer Part Number=RC0402FR-07100KL, Moisture Sensitivity=NO, Part Number=RC0402FR-07100KL, Pin Count=2, Published=9/6/2017, Publisher="Randy Parmerlee", Status=Active, Wattage=0.063W
R12: library part RC0402FR-07100RL, "RES SMD 100 OHM 1% 1/16W 0402", Distributor 1 Part Number=311-100LRCT-ND, Manufacturer=Yageo, Package=RES0402, Package Type=SMD, Tolerance=0.01, Voltage=N/A, Component Type="RES - CHIP", Distributor 1=Digi-Key, ESD=NO, Manufacturer Part Number=RC0402FR-07100RL, Moisture Sensitivity=NO, Part Number=RC0402FR-07100RL, Pin Count=2, Published=9/6/2017, Publisher="Randy Parmerlee", Status=Active, Wattage=0.063W
SW1: "SWITCH TACTILE SPST-NO 0.05A 12V", Current=0.05A, Distributor 1 Part Number=EG5042CT-ND, Manufacturer=E-Switch, Package="Gull Wing", Package Type=SMD, Voltage=N/A, Component Type="SWITCH - SMD", Distributor 1=Digi-Key, ESD=NO, Manufacturer Part Number=TL1014BF160QG, Moisture Sensitivity=NO, Part Number=TL1014BF160QG, Pin Count=4, Published=10/8/2018, Publisher="Randy Parmerlee", Status=Active
TP1 TP2 TP3 TP4 TP5: "TEST POINT ROUND 1.6mm", Current=N/A, Manufacturer=GlassBoard, Package=TP16MMSMD, Package Type=SMD, Component Type="TP - SMD", Distributor 1=GlassBoard, Distributor 1 Part Number=N/A, Manufacturer Part Number=TESTFIXTURE_16MM, Part Number=TESTFIXTURE_16MM, Pin Count=1, Published=12/8/2020, Publisher="Ethan Harmon", Status=Actiive, Voltage=N/A
U1: "IC REG LDO 3.3V 0.15A SOT25", Distributor 1 Part Number=AP2204K-3.3TRG1DITR-ND, Manufacturer="Diodes Incorporated", Package=SOT-23-5, Package Type=SMD, Voltage=24V, Component Type="IC - LDO", Distributor 1=Digi-Key, ESD=YES, Manufacturer Part Number=AP2204K-3.3TRG1, Moisture Sensitivity=YES, Part Number=AP2204K-3.3TRG1, Pin Count=5, Published=6/14/2017, Publisher="Randy Parmerlee", Status=Active
U2: "IC MCU 32BIT 128KB FLASH 48LQFP", Distributor 1 Part Number=497-6288-ND, Manufacturer=STMicroelectronics, Package=LQFP-48, Package Type=SMD, Voltage="2V ~ 3.6V", Component Type="IC - MICRO", Distributor 1=Digi-Key, ESD=YES, Manufacturer Part Number=STM32F103CBT6, Moisture Sensitivity=YES, Part Number=STM32F103CBT6, Pin Count=48, Published=12/7/2020, Publisher="Stephen Murphy", Status=Active
X1: "CRYSTAL 8.0000MHZ 18PF SMD", Distributor 1 Part Number=535-9720-1-ND, Manufacturer="Abracon LLC", Package=SDM-4, Package Type=SMD, Voltage=N/A, Component Type="OSC - SMD", Distributor 1=Digi-Key, ESD=YES, Manufacturer Part Number=ABM3B-8.000MHZ-B2-T, Moisture Sensitivity=YES, Part Number=ABM3B-8.000MHZ-B2-T, Pin Count=4, Published=9/18/2018, Publisher="Randy Parmerlee", Status=Active

## Via types
v1: diameter 0.5, hole 0.25, Top Layer to Bottom Layer, tented both sides, 35 vias

## Nets (pads, with @x,y where several pads share a name; then routed paths per layer and width w, separated by ;. In a path a pad name is that pad's centre, name@x,y a point inside that pad or via, vN(x,y) a via of type N, cw(c..) or ccw(c..) an arc to the next point about the centre after c; other vN are vias at no path point)
3V3_DIV: R6.1 R7.2 U2.10 | length 5.5
  Top Layer w0.2: R7.2 R6.1 15.95,2.1 16.825,2.975 16.825,4.8 17,4.975 17.8,4.975 U2.10
  Top Layer w0.254: U2.10@17.329,5 U2.10
5V_USB: C1.2 C2.2 CN3.1 U1.1 U1.3 | length 7.1
  Top Layer w0.45: CN3.1 5.775,5.45 C1.2 C1.2@6.26,4.965 ; C2.2 6.25,2.575 7.275,2.575 7.3,2.55 7.375,2.625 8.125,2.625 8.4,2.9 8.4,3.8 8.1,4.1 7.875,4.325 7.875,4.925 7.8,5 7.375,5 ; U1.1@7.075,4.45 7.3,4.45 U1.1@7.375,4.375
+3V3: C3.2 C4.2 C5.2 C6.2 C7.2 C8.2 CN1.1 R1.2 R2.2 R3.1 R4.1 R6.2 TP1.1 U1.5 U2.1 U2.9 U2.24 U2.36 U2.48 | length 82.6
  Top Layer w0.2: C5.2 16.898,5.498 U2.9@17.823,5.498
  Top Layer w0.25: v1(15.5,5) 15.568,5 15.768,4.8 C5.2 ; U2.1 18.9,9.5 19.2,9.8 U2.48 19.2,11.9 C8.2 ; U2.24 24.7,1.946 24.846,1.8 C6.2 ; U2.36 26.754,9.5 26.9,9.646 C7.2
  Top Layer w0.254: U2.9@17.823,5.498 U2.9
  Top Layer w0.45: R3.1 6.19,11.95 6.19,11.41 v1(6.2,11.4) ; R4.1 9.99,11.95 9.99,11.41 v1(10,11.4) ; R6.2 16.85,2 16.9,2 17.09,1.81 17.59,1.81 v1(17.6,1.8) 17.6,1.786 17.65,1.736 R1.2 ; R2.2 v1(32.2,12.3)
  Top Layer w0.5: U1.5@10.05,4.45 10.1,4.5 C4.2 C3.2 v1(11.023,6.623) ; C8.2 19.601,12.1 v1(19.605,12.096) ; v1(25.5,1.1) C6.2 ; v1(26.1,10.3) C7.2
  L2 w0.45: v1(6.2,11.4) 7.1,12.3 9.1,12.3 v1(10,11.4)
  L2 w0.5: v1(10,11.4) 11.023,10.377 v1(11.023,7.3) v1(11.023,6.623) 16.007,6.623 16.3,6.916 16.3,10.3 18.1,12.1 19.601,12.1 v1(19.605,12.096) ; v1(15.5,5) 16,5 16.2,4.8 16.2,2.7 17.1,1.8 v1(17.6,1.8) 25.4,1.8 ; v1@19.7,12.1 27,12.1 ; v1(25.5,1.1) 25.5,1.7 25.4,1.8 ; v1(26.1,10.3) 27,10.3 ; v1(32.2,12.3) 32,12.1 27,12.1 ; 25.4,1.8 26.3,1.8 27,2.5 27,10.3 ; 27,10.3 27,12.1
  Bottom Layer w0.5: CN1.1 25.77,9.29 25.9,9.42 25.9,10.1 v1(26.1,10.3) 27.3,10.3 TP1.1
GND: C1.1 C2.1 C3.1 C4.1 C5.1 C6.1 C7.1 C8.1 C9.1 C10.1 C11.1 CN1.3 CN1.5 CN1.9 CN2.3 CN2.5 CN3.5 CN3.M1 D3.2 D4.2 D4.5 R7.1 R10.2 R11.1 SW1.2 SW1.4 TP5.1 U1.2 U2.8 U2.20 U2.23 U2.35 U2.47 X1.2 X1.4 | length 20.3
  Top Layer w0.25: v1(4.7,2.9) 4.7,4.11 4.715,4.125 4.79,4.2 C1.1 C2.1 6.275,3.45 7.25,3.45 U1.2@7.3,3.5 ; CN3.5@4.715,8.123 CN3.5 ; 14.8,5.9 14.902,6.002 15.4,6.002 15.713,6.315 16.065,6.315 C10.1 ; U2.8 18.925,6 18.999,5.926 19.007,5.926 19.185,5.748 19.252,5.748 v1(19.3,5.7) ; 19.7,9.5 U2.47 U2.47@19.7,11.375 ; 22.7,1.2 U2.20 ; 24.2,1.5 U2.23 ; 25,9 U2.35
  Top Layer w0.45: CN3.M1@2.2,7.95 2.3,8.05 CN3.5
  Top Layer w0.5: 3.404,9.472 3.501,9.375 4.715,9.375 4.715,10.682 4.712,10.684 ; 3.486,4.11 CN3.M1@4.7,4.11
  Bottom Layer w0.25: CN1.3 CN1.3@25.17,7.8
  other v1: 8.2,9.3 9.1,9.3
IF_R\E\S\E\T\: CN1.10 R1.1 TP4.1 U2.7 | length 13.4
  Top Layer w0.2: U2.7 v1(19,6.5) 19.6,6.5 20,6.1 20,5.4 18.873,4.273 18.873,3.673 18.55,3.35 R1.1
  Bottom Layer w0.2: v1(19,6.5) 18.4,6.5 18.1,6.2 TP4.1 18.89,4.21 CN1.10
IF_SWCLK: CN1.4 TP3.1 U2.37 | length 10.3
  Top Layer w0.2: U2.37@24.725,10.972 24.7,10.947 U2.37 25.207,10.875 25.4,11.068 v1(25.4,11.4)
  Bottom Layer w0.2: TP3.1@18.3,8 21.03,8 CN1.4 21.323,8.02 21.603,8.3 22.301,8.3 22.4,8.3 23.2,9.1 23.2,10.1 24.5,11.4 v1(25.4,11.4)
IF_SWDIO: CN1.2 TP2.1 U2.34 | length 8.6
  Top Layer w0.2: v1(22.6,9.2) 23.3,8.5 U2.34
  Bottom Layer w0.2: TP2.1@18.3,10.5 19.51,9.29 CN1.2 21.14,9.2 v1(22.6,9.2)
IF_USB_DM: R8.2 U2.32 | length 14.9
  Top Layer w0.2: R8.2 12.063,9.313 12.687,9.313 v1(12.7,9.3) ; v1(23.2,7.3) 23.281,7.3 23.481,7.5 U2.32
  L3 w0.2: v1(12.7,9.3) 14.7,7.3 v1(23.2,7.3)
IF_USB_DP: R9.2 U2.33 | length 15.2
  Top Layer w0.2: R9.2 v1(12.7,10.2) ; v1(22.9,8) U2.33
  L3 w0.2: v1(12.7,10.2) 15.273,7.627 22.495,7.627 22.868,8 v1(22.9,8)
LED_COM_GREEN: D2.2 U2.41 | length 14.4
  Top Layer w0.2: v1(12.5,11.4) 12.5,12.377 D2.2 ; U2.41 v1(22.7,12.9)
  Bottom Layer w0.2: v1(12.5,11.4) 13.346,12.246 18.717,12.246 19.363,11.6 21.4,11.6 v1(22.7,12.9)
LED_DAP_BLUE: D1.2 U2.42 | length 17
  Top Layer w0.2: D1.2 8.7,12.396 v1(8.7,11.4) ; v1(21.8,12.9) 22.2,12.5 U2.42
  Bottom Layer w0.2: v1(8.7,11.4) 9.873,12.573 20.3,12.573 20.45,12.423 21.323,12.423 v1(21.8,12.9)
LED_PWR_RED: R5.1 U2.30 | length 15.7
  Top Layer w0.2: R5.1 13.887,11.936 13.887,11.414 v1(13.9,11.4) ; v1(23.1,6.5) U2.30
  Bottom Layer w0.2: v1(13.9,11.4) 13.9,10.575 17.502,6.973 18.725,6.973 19.152,7.4 22.301,7.4 22.672,7.029 22.672,6.928 v1(23.1,6.5)
NetCN3_2: CN3.2 D4.1 D4.6 R8.1 | length 8.9
  Top Layer w0.2: CN3.2@4.912,6.225 CN3.2 6,6.1 6.3,6.4 6.3,8.1 6.55,8.35 D4.6 D4.1 10.1,8.525 10.4,8.525 11.15,9.275 R8.1
NetCN3_3: CN3.3 D4.3 D4.4 R9.1 | length 9.4
  Top Layer w0.2: CN3.3 5.75,6.75 5.973,6.973 5.973,9.673 6.55,10.25 D4.4 D4.3 9.95,10.225 11.125,10.225 R9.1
NetD1_1: D1.1 R3.2 | length 1.2
  Top Layer w0.2: R3.2 6.746,12.85 D1.1
NetD2_1: D2.1 R4.2 | length 1.2
  Top Layer w0.2: R4.2 10.573,12.85 D2.1
NetD3_1: D3.1 R5.2 | length 1.2
  Top Layer w0.2: R5.2 14.473,12.85 D3.1
NetR10_1: R10.1 U2.44 | length 19.4
  Top Layer w0.2: R10.1@5.273,11.85 5.286,11.836 v1@5.286,11.4 ; v1(20.9,12.9) 20.9,12.819 21.2,12.519 U2.44
  Bottom Layer w0.2: v1(5.3,11.4) 5.3,12.327 5.873,12.9 v1(20.9,12.9)
NetR11_2: R11.2 U2.2 | length 1.6
  Top Layer w0.2: R11.2 16.225,8.975 17.8,8.975 U2.2
NetR12_1: R12.1 U2.25 | length 2.4
  Top Layer w0.2: U2.25 26.1,4.025 28.375,4.025 R12.1
OSC_IN: C9.2 U2.5 X1.1 | length 6.7
  Top Layer w0.2: X1.1@12.4,7.6 12.4,7.2 13.1,6.5 15.4,6.5 C9.2 16.825,7.3 17,7.475 17.8,7.475 U2.5
  Top Layer w0.254: X1.1@12.4,7.6 X1.1@12.4,7.75
OSC_OUT: C10.2 U2.6 X1.3 | length 5.7
  Top Layer w0.2: X1.3 14.8,3.95 14.8,4.975 15.475,5.65 C10.2 16.358,5.808 16.708,5.808 16.825,5.925 16.825,6.823 17,6.998 17.823,6.998 U2.6
TGT_R\E\S\E\T\: C11.2 CN2.10 R2.1 SW1.1 SW1.3 U2.18 | length 31.2
  Top Layer w0.2: U2.18 21.7,3.483 21.817,3.6 25.1,3.6 26.1,2.6 28.15,2.6 28.175,2.625 SW1.3 29.216,2.6 29.87,1.946 32.146,1.946 32.8,2.6 SW1.1 33.7,2.7 C11.2 34.4,4.8 34.4,11.253 34.283,11.37 30.81,11.37 30.55,11.63 R2.1 29.544,12.3 29.08,11.836 29.08,10.77 CN2.10 CN2.10@29.87,10.74
TGT_SWCLK: CN2.4 U2.15 U2.26 | length 15
  Top Layer w0.2: U2.15 20.2,3.8 20.9,4.5 U2.26 27.419,4.5 27.619,4.7 v1(27.7,4.7) ; CN2.4 29.08,6.9 v1(30.5,6.9)
  Bottom Layer w0.2: v1(27.7,4.7) 29.7,4.7 30.5,5.5 v1(30.5,6.9)
TGT_SWDIO: CN2.2 R12.2 U2.27 | length 4.9
  Top Layer w0.2: U2.27 26.969,5 27.629,5.66 CN2.2 29.07,5.66 29.35,5.38 R12.2
TGT_SWO: CN2.6 U2.31 | length 3.5
  Top Layer w0.2: U2.31 27.03,7 28.23,8.2 CN2.6
TGT_UART_RX: CN2.7 U2.12 | length 21.3
  Top Layer w0.2: v1(17.8,3.3) 17.8,3.975 U2.12
  Top Layer w0.5: v1(31.477,9.4) 32.88,9.4 CN2.7
  Bottom Layer w0.2: v1(17.8,3.3) 17.881,3.3 18.131,3.05 29.65,3.05 31.477,4.877 v1(31.477,9.4)
TGT_UART_TX: CN2.9 U2.13 | length 20.8
  Top Layer w0.2: U2.13 v1@19.2,3.619
  Top Layer w0.5: v1(31.4,10.7) 32.91,10.7 CN2.9
  Bottom Layer w0.2: v1(19.4,3.733) 19.467,3.733 19.823,3.377 29.352,3.377 31,5.025 31,10.3 v1(31.4,10.7)
pads on no net: CN1.6 CN1.7 CN1.8 CN2.1 CN2.8 CN3.4 FID1.0 FID2.0 FID3.0 SW1.5 SW1.6 U1.4 U2.3 U2.4 U2.11 U2.14 U2.16 U2.17 U2.19 U2.21 U2.22 U2.28 U2.29 U2.38 U2.39 U2.40 U2.43 U2.45 U2.46

## Polygon pours and split planes (outlines as drawn)
GND on L3 "GND_L03_P000" (solid, pour order 0): -0.3,13.8 35.7,13.8 35.7,-0.3 -0.3,-0.3
GND on L2 "GND_L02_P004" (solid, pour order 4): -0.368,13.75 35.632,13.75 35.632,-0.35 -0.368,-0.35
GND on Bottom Layer "GND_L04_P005" (solid, pour order 5): -0.45,13.65 35.55,13.65 35.55,-0.45 -0.45,-0.45
GND on Top Layer "GND_L01_P001" (solid, pour order 1): -0.3,13.8 35.7,13.8 35.7,-0.3 -0.3,-0.3

## Other copper
Top Layer:
  rectangle net GND: 0.5,1.5 3.729,10.827
  rectangle net 5V_USB: 6.775,4.1 8.1,5
  rectangle net 5V_USB: 5.7,4.7 8.1,5.7

## Silkscreen, mask and mechanical layers (free items; w line width, h text height)
Top Solder:
  text "GlassLink" at 6.6,0.4 h1.5
  text "R0.1" at 12,0.4 h1.5
Board Outline:
  the board outline again, w0.2

## Text inside footprints (layer, text, board x,y; h text height)
CN3: Top Assembly "1" at 3.381,8.192 h1 r270; Top Overlay "1" at 5.681,8.217 h1 r270